# Altium PCB bbr18_pc_battery_connection_board.PcbDoc
Units mm, origin at the board's own origin, x right, y up, seen from the top; angles counter-clockwise.
Board outline 22 x 16 mm, 2 copper layers (Top Layer, Bottom Layer), stack 1.571 mm thick; 4 components, 8 nets, 17 pads, 18 vias.
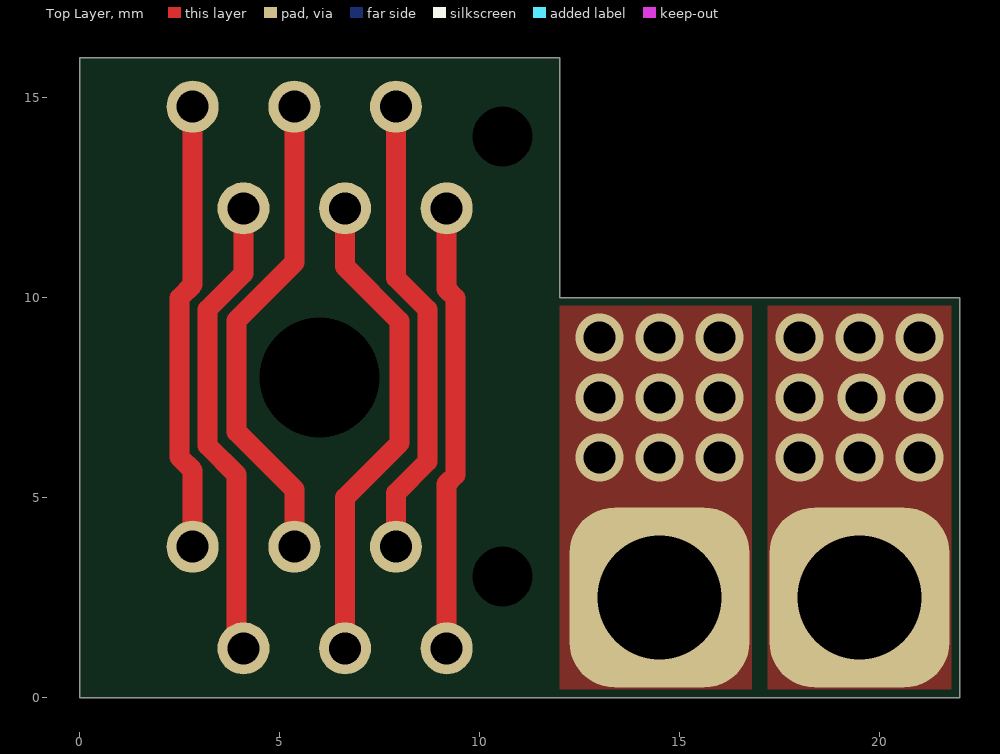
[diagram p0: Top Layer view]
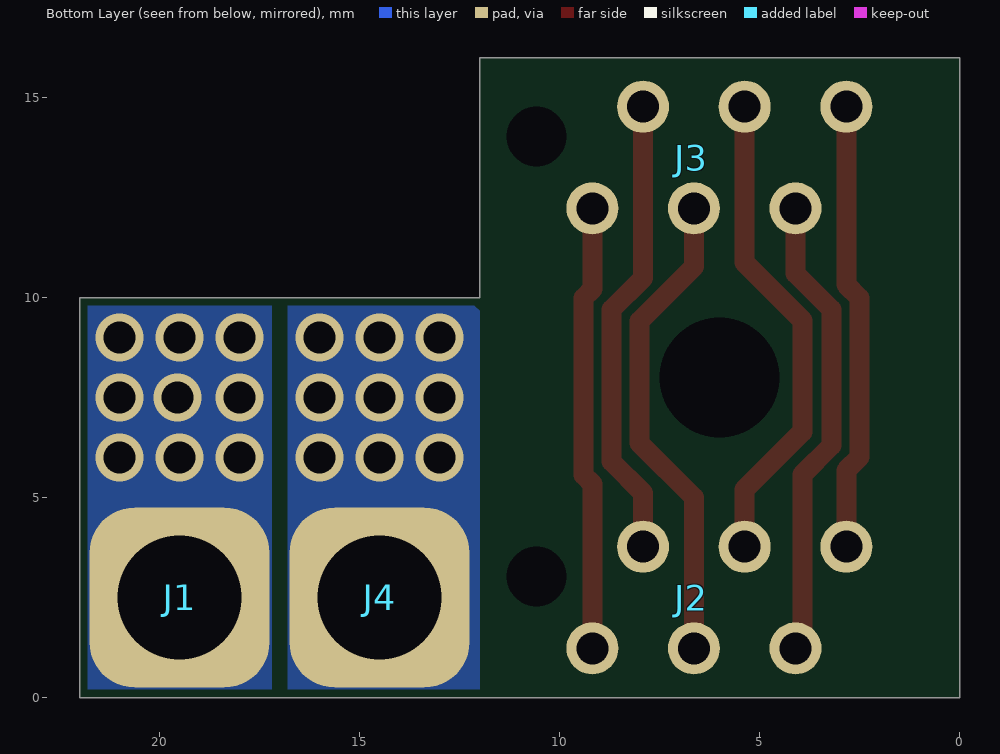
[diagram p1: Bottom Layer view, seen from below]

## Layer stack, top to bottom
Top Solder: solder mask 0.0102, Solder Resist, Dk 3.5
Top Layer: signal copper 0.0356
Dielectric 1: dielectric 1.5, FR-4, Dk 4.8
Bottom Layer: signal copper 0.0356
Bottom Solder: solder mask 0.0102, Solder Resist, Dk 3.5

## Board outline
0,0 22,0 22,10 12,10 12,16 0,16

## Design rules (kind name [scope] priority, off if disabled: settings)
BoardOutlineClearance [All] p1: gap=0.2 ignorepadtopadclearanceinfootprint=FALSE except(0: Arc-SplitContinuation Track-SplitContinuation SMDPad-SplitContinuation THPad-SplitContinuation Via-SplitContinuation Fill-SplitContinuation Poly-SplitContinuation Region-SplitContinuation Text-SplitContinuation)
Clearance ClearanceKeepOut [All vs OnLayer('Keep-Out Layer')] p1: gap=0.1 ignorepadtopadclearanceinfootprint=FALSE
Clearance [All] p2: gap=0.2 ignorepadtopadclearanceinfootprint=FALSE
ComponentClearance NetTieClearance [HasFootprint('NET-TIE-0602')] p1: gap=0 collisioncheckmode=3 verticalgap=0 showdistances=FALSE
ComponentClearance [All] p2: gap=0.2 collisioncheckmode=3 verticalgap=0.2 showdistances=FALSE
DiffPairsRouting [All] p1: maxlimit=0.3 minlimit=0.2 mostfreqgap=0.2 toplayer_minwidth=0.2 toplayer_maxwidth=1 toplayer_prefwidth=0.3 bottomlayer_minwidth=0.2 bottomlayer_maxwidth=1 bottomlayer_prefwidth=0.3 maxuncoupledlength=12.7
HoleSize [All] p1: absolutevalues=TRUE maxlimit=5 minlimit=0.3 maxpercent=80.000 minpercent=20.000
HoleToHoleClearance [All] p1: gap=0.2 allowstackedmicrovias=TRUE
MinimumSolderMaskSliver [All] p1: minsoldermaskwidth=0.2
PolygonConnect [All] p1: connectstyle=Direct reliefconductorwidth=0.254 reliefentries=4 polygonreliefangle="90 Angle" airgapwidth=0.254
RoomDefinition bbr18_pc_battery_connection_board [InComponentClass('bbr18_pc_battery_connection_board')] p1: confinementstyle=ConfineIn formatcopy=TRUE lockcomponents=FALSE outline -15.6,-4 55,-4 55,36 -15.6,36
RoutingVias [All] p1: holewidth=0.3 width=0.6 viastyle="Through Hole" minholewidth=0.3 minwidth=0.6 maxholewidth=2 maxwidth=3
SolderMaskExpansion SolderMaskExpansionVia [IsVia And (Not IsTestpoint)] p1: expansion=-5
SolderMaskExpansion [All] p2: expansion=0.1
Width [All] p1: maxlimit=5 minlimit=0.2 preferedwidth=0.3
25 further rules are at their usual default settings.

## Components (designator, comment, footprint, x,y, rotation, side; value= is the part's Value field where it differs from the comment)
J1 "HEADER-1" 2MM-BANANA-VIA 19.5,2.5 r180 bottom
J2 "HEADER-6" MICRO-MATCH-FOB-06 9.18,1.23 r0 bottom
J3 "HEADER-6" MICRO-MATCH-FOB-06 9.18,12.23 r0 bottom
J4 "HEADER-1" 2MM-BANANA-VIA 14.5,2.5 r180 bottom

## Footprints (in the part's own frame and the unit in brackets; to place one, negate y for a bottom-side part, rotate by r counter-clockwise, add the part's x,y. Pads: shape width x height; smd on the part's side, far side on the other; paste and mask are expansions set on the pad)
2MM-BANANA-VIA [mm]
  rrect50% 4.5x4.5 hole 3.1: 1(0,0)
  body extent -2,-2 2,2, height 1.51
MICRO-MATCH-FOB-06 [mm]
  round 1.3 hole 0.8: 1(0,0) 2(-1.27,-2.54) 3(-2.54,0) 4(-3.81,-2.54) 5(-5.08,0) 6(-6.35,-2.54)
  round 0 hole 1.5 unplated: drill(1.4,-1.8)
  body extent -7.95,-3.77 1.6,1.23, height 4

## Free pads (board coordinates)
  round 0 hole 3: 2(6,8)

## Via types
v1: diameter 1.2, hole 0.8, Top Layer to Bottom Layer, 18 vias

## Nets (pads, with @x,y where several pads share a name; then routed paths per layer and width w, separated by ;. In a path a pad name is that pad's centre, name@x,y a point inside that pad or via, vN(x,y) a via of type N, cw(c..) or ccw(c..) an arc to the next point about the centre after c; other vN are vias at no path point)
BAT+: J1.1
  other v1: 18,6 19.5,6 21,6 18,7.5 19.55,7.5 21,7.5 18,9 19.5,9 21,9
BAT-: J4.1
  other v1: 13,6 14.5,6 16,6 13,7.5 14.5,7.5 16,7.5 13,9 14.5,9 16,9
NetJ2_1: J2.1 J3.1 | length 11.2
  Top Layer w0.5: J2.1 9.18,5.343 9.4,5.563 9.4,9.99 9.18,10.21 J3.1
NetJ2_2: J2.2 J3.2 | length 11.7
  Top Layer w0.5: J2.2 7.91,5.11 8.7,5.9 8.7,9.7 7.91,10.49 J3.2
NetJ2_3: J2.3 J3.3 | length 12.1
  Top Layer w0.5: J2.3 6.64,5 8,6.36 8,9.41 6.64,10.77 J3.3
NetJ2_4: J2.4 J3.4 | length 12.2
  Top Layer w0.5: J2.4 5.37,5.203 3.93,6.643 3.93,9.43 5.37,10.87 J3.4
NetJ2_5: J2.5 J3.5 | length 11.7
  Top Layer w0.5: J2.5 3.93,1.4 3.93,5.57 3.2,6.3 3.2,9.7 4.1,10.6 J3.5
NetJ2_6: J2.6 J3.6 | length 11.3
  Top Layer w0.5: J2.6 2.83,5.68 2.5,6.01 2.5,9.99 2.83,10.32 J3.6
pads on no net: J2.drill J3.drill

## Polygon pours and split planes (outlines as drawn)
BAT- on Top Layer "Top Layer-NetJ4_1" (solid, remove dead copper, pour order 6): 12,10 16.8,10 16.8,0 12,0
BAT+ on Top Layer "Top Layer-NetJ1_1" (solid, remove dead copper, pour order 0): 22,0 17.2,0 17.2,10 22,10
BAT- on Bottom Layer "Bottom Layer-NetJ4_1" (solid, remove dead copper, pour order 4): 16.8,0 12,0 12,10 16.8,10
BAT+ on Bottom Layer "Bottom Layer-NetJ1_1" (solid, remove dead copper, pour order 2): 17.2,0 22,0 22,10 17.2,10
no net on Bottom Solder "NONET_L-01_P-001" (solid): 17.2,10 22,10 22,0 17.2,0
no net on Bottom Solder "NONET_L-01_P-001" (solid): 12,0 12,10 16.8,10 16.8,0

## Silkscreen, mask and mechanical layers (free items; w line width, h text height)
Mechanical 1:
  the board outline again, w0.01